# Altium PCB do_an.PcbDoc
Units mil, origin at the board's own origin, x right, y up, seen from the top; angles counter-clockwise.
Board outline 3530 x 2715 mil, 2 copper layers (Top Layer, Bottom Layer); 15 components, 19 nets, 67 pads, 0 vias.
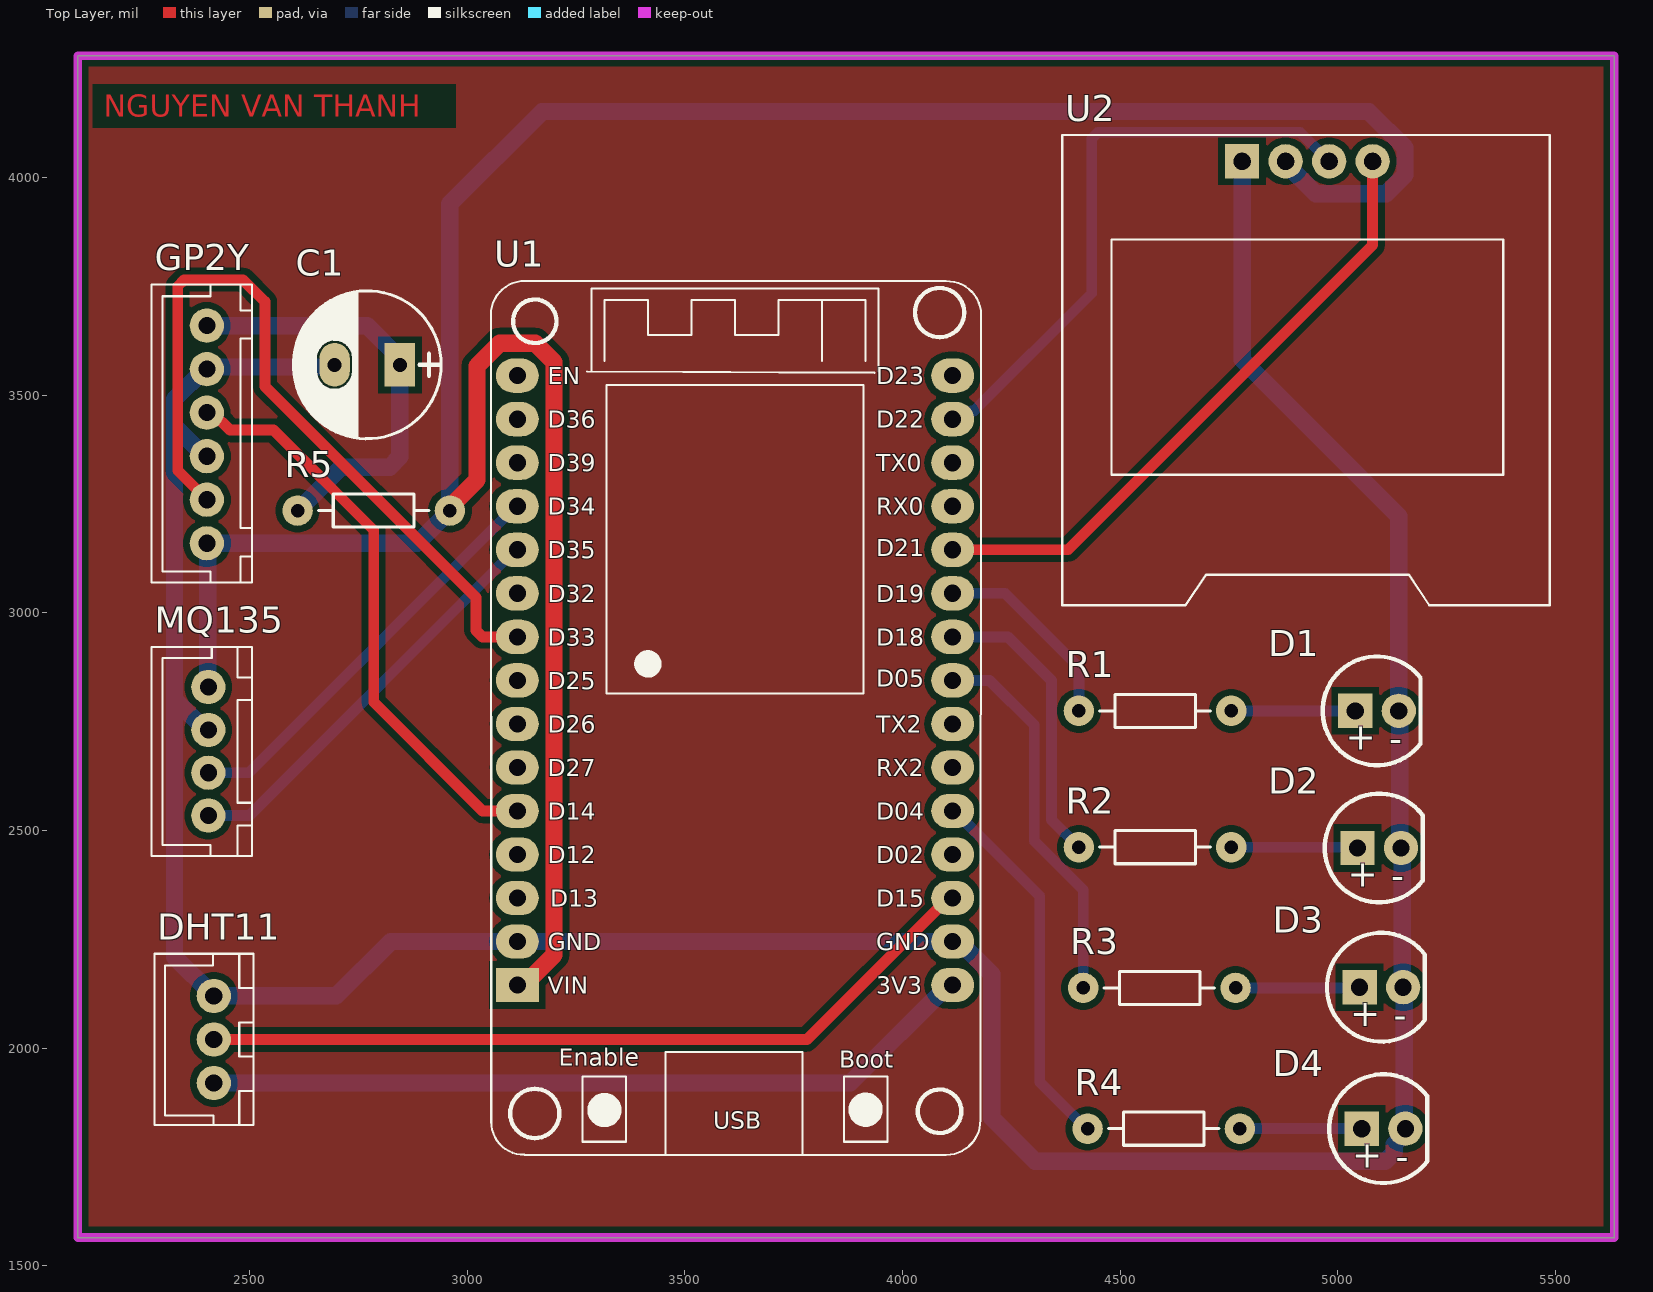
[diagram p0: Top Layer view]
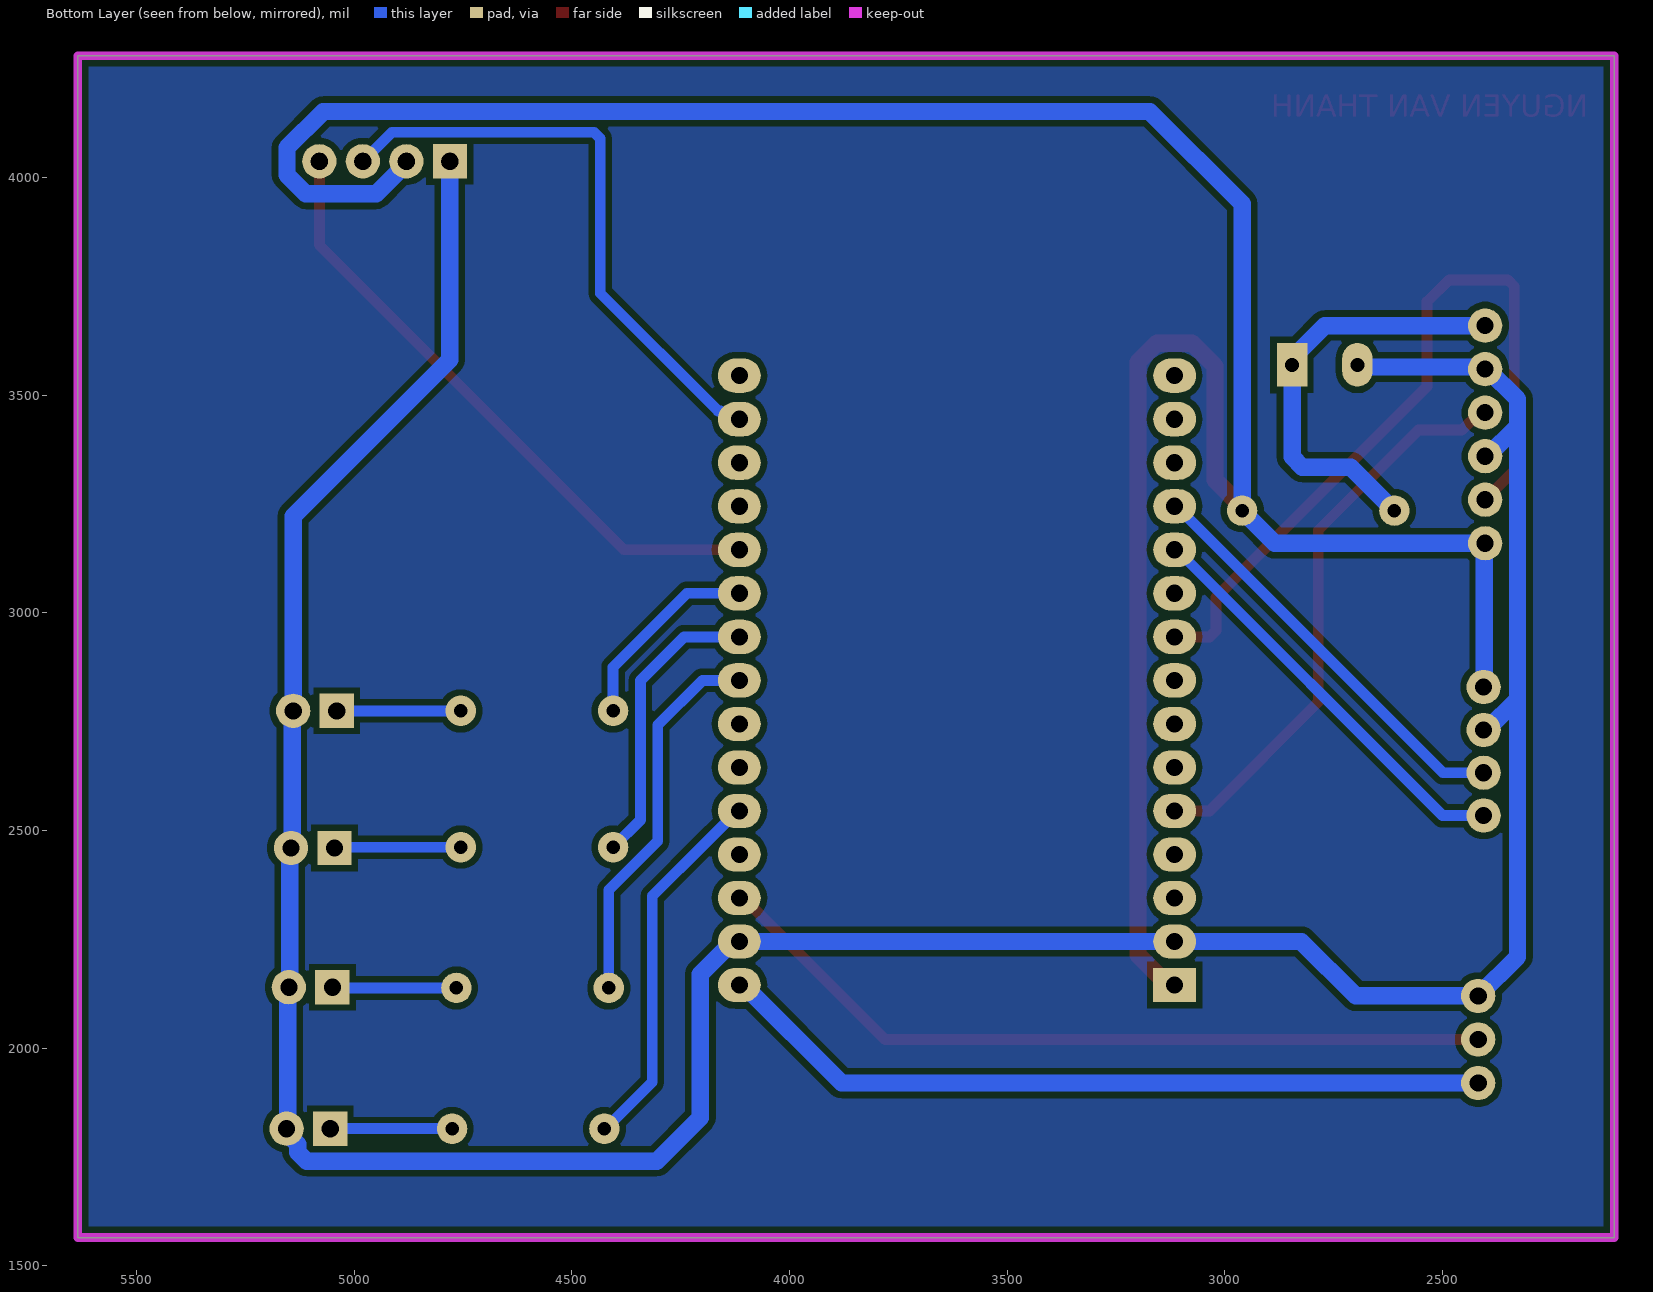
[diagram p1: Bottom Layer view, seen from below]
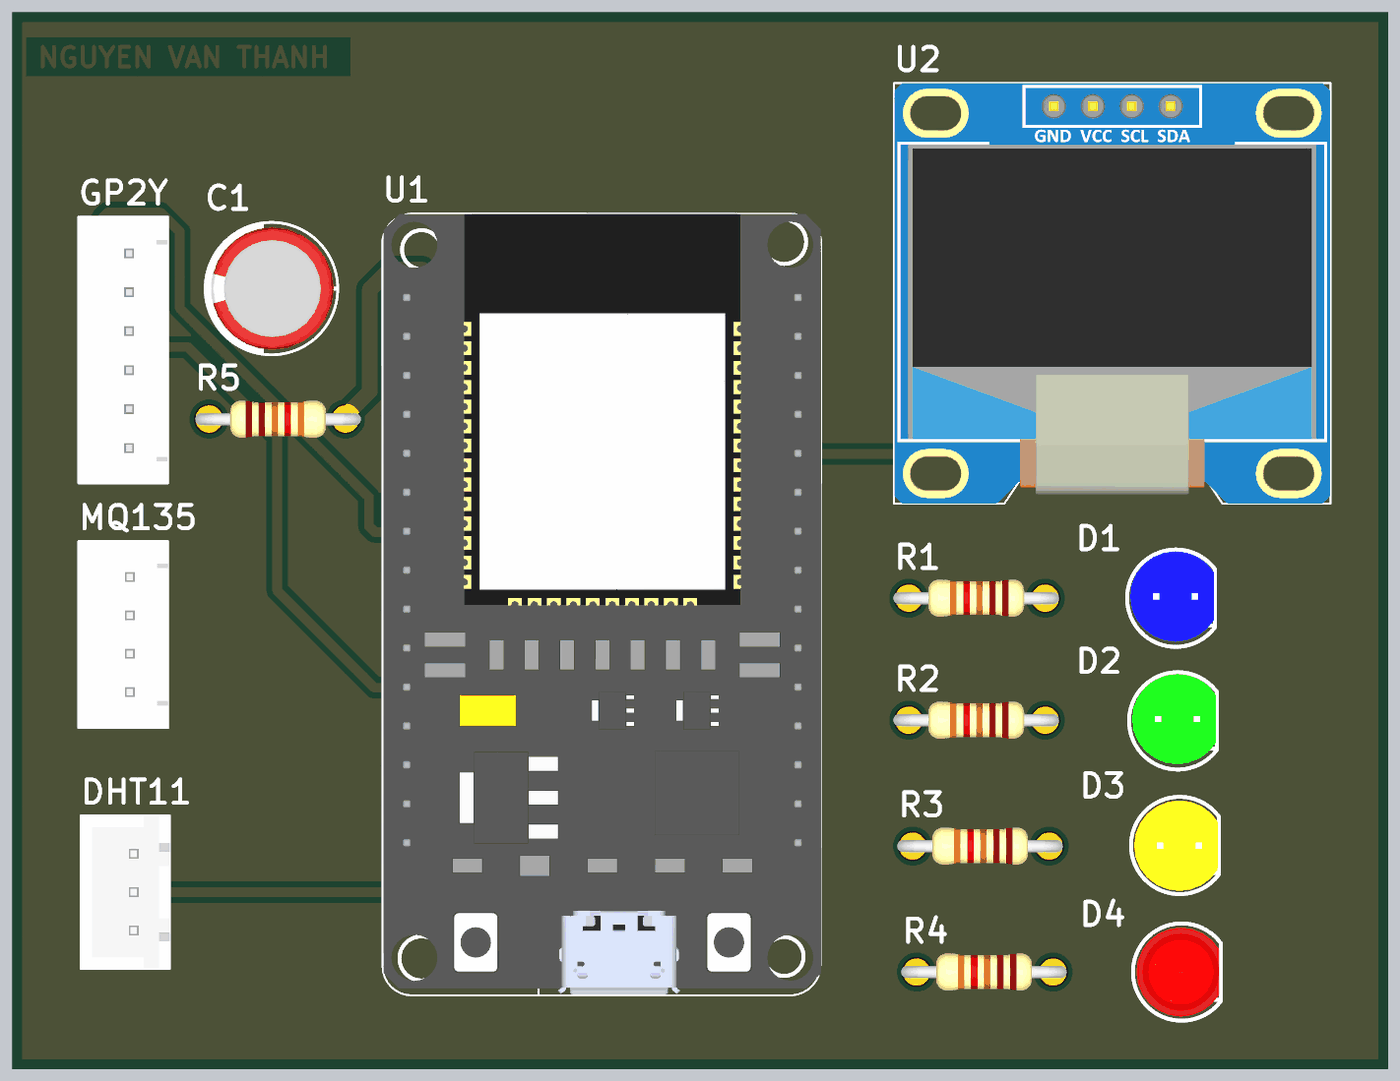
[diagram p2: 3D render of the assembled board from above, using the file's embedded part models]

## Layer stack, top to bottom
Top Solder: solder mask 0.4, Solder Resist, Dk 3.5
Top Layer: signal copper 1.4
Dielectric 1: dielectric 12.6, FR-4, Dk 4.8
Bottom Layer: signal copper 1.4
Bottom Solder: solder mask 0.4, Solder Resist, Dk 3.5

## Board outline
2105,1565 5635,1565 5635,4280 2105,4280

## Design rules (kind name [scope] priority, off if disabled: settings)
Clearance [All] p1: gap=15 ignorepadtopadclearanceinfootprint=FALSE
PolygonConnect [All] p1: connectstyle=Relief reliefconductorwidth=10 reliefentries=4 polygonreliefangle="90 Angle" airgapwidth=10
RoutingVias [All] p1: holewidth=28 width=50 viastyle="Through Hole" minholewidth=28 minwidth=50 maxholewidth=28 maxwidth=50
SolderMaskExpansion [All] p1: expansion=4 istentingtop=FALSE
Width [All] p1: maxlimit=50 minlimit=15 preferedwidth=25
30 further rules are at their usual default settings.

## Components (designator, comment, footprint, x,y, rotation, side; value= is the part's Value field where it differs from the comment)
C1 "220uF" CP1.5/3.4 2845,3570 r180 top value=1000uF/16V
D1 "LED_BLUE" LED_5mm_BLUE 5090,2775 r0 top
D2 "LED_GREEN" LED_5mm_GREEN 5095,2460 r0 top
D3 "LED_YELLOW" LED_5mm_YELLOW 5100,2140 r0 top
D4 "LED_RED" LED_5mm_RED 5105,1815 r0 top
DHT11 "DHT11" JST-2.54-3P 2395,2020 r0 top
GP2Y "GP2Y1010AU0F" JST-2.54-6P 2389.84,3412.24 r0 top
MQ135 "MQ135" JST-2.54-4P 2389.84,2681.57 r0 top
R1 "150" R1/4W 4405,2775 r0 top value="R1/4W - 1K"
R2 "150" R1/4W 4405,2461.67 r0 top value="R1/4W - 1K"
R3 "150" R1/4W 4415,2138.33 r0 top value="R1/4W - 1K"
R4 "150" R1/4W 4425,1815 r0 top value="R1/4W - 1K"
R5 "150" R1/4W 2960,3235 r180 top value="R1/4W - 1K"
U1 "ESP32_30 PIN" ESP32_30 3615,2845 r0 top
U2 "DISPLAY_OLED" DISPLAY_OLED 4930,3560 r0 top

## Footprints (in the part's own frame and the unit in brackets; to place one, negate y for a bottom-side part, rotate by r counter-clockwise, add the part's x,y. Pads: shape width x height; smd on the part's side, far side on the other; paste and mask are expansions set on the pad)
CP1.5/3.4 [mil] "Tu hoa 220->470uF,16V, 470uF/16V,25V"
  rect 70x100 hole 32: 1(0,0)
  oval 70x100 hole 32: 2(150,0)
  silkscreen extent -95,-170 245,170, body extent -85,-157 230,157, height 446
DISPLAY_OLED [mm]
  rect 2x2 hole 1: 1(-3.81,12.128)
  round 2 hole 1: 2(-1.27,12.128) 3(1.27,12.128) 4(3.81,12.128)
  silkscreen extent -14.3,-13.78 14.15,13.66, body extent -14.28,-13.76 14.12,13.64, height 5.7
ESP32_30 [mm] "Microcontoller Board 30 Pins Wifi 2.4GHz BLE 4.2 ESP32-WROOM-32D"
  oval 2.5x2 hole 1: 1(-12.7,17.78) 2(-12.7,15.24) 3(-12.7,12.7) 4(-12.7,10.16) 5(-12.7,7.62) 6(-12.7,5.08) 7(-12.7,2.54) 8(-12.7,0) 9(-12.7,-2.54) 10(-12.7,-5.08) 11(-12.7,-7.62) 12(-12.7,-10.16) 13(-12.7,-12.7) 14(-12.7,-15.24) 16(12.7,17.78) 17(12.7,15.24) 18(12.7,12.7) 19(12.7,10.16) 20(12.7,7.62) 21(12.7,5.08) 22(12.7,2.54) 23(12.7,0) 24(12.7,-2.54) 25(12.7,-5.08) 26(12.7,-7.62) 27(12.7,-10.16) 28(12.7,-12.7) 29(12.7,-15.24) 30(12.7,-17.78)
  rect 2.5x2 hole 1: 15(-12.7,-17.78)
  silkscreen extent -14.23,-27.69 14.35,23.31, body extent -14.15,-27.61 14.35,23.29, height 7
JST-2.54-3P [mm]
  round 2 hole 1: 1(0.573,2.54) 2(0.573,0) 3(0.573,-2.54)
  silkscreen extent -2.9,-5 2.9,5, body extent -2.85,-4.95 2.9,4.95, height 7.02
JST-2.54-4P [mm]
  round 2 hole 1: 1(0.385,3.76) 2(0.385,1.26) 3(0.385,-1.24) 4(0.385,-3.74)
  silkscreen extent -2.92,-6.1 2.92,6.1, body extent -2.92,-6.09 2.92,6.09, height 7.21
JST-2.54-6P [mm]
  round 2 hole 1: 1(0.298,6.293) 2(0.298,3.753) 3(0.298,1.213) 4(0.298,-1.327) 5(0.298,-3.867) 6(0.298,-6.407)
  silkscreen extent -2.92,-8.69 2.92,8.69, body extent -2.97,-8.73 2.87,8.64, height 7.23
LED_5mm_BLUE [mm]
  rect 2x2 hole 1: 1(-1.27,0)
  round 2 hole 1: 2(1.27,0)
  silkscreen extent -3.17,-3.17 2.54,3.17, body extent -2.97,-2.83 2.48,3.07, height 8.65
LED_5mm_GREEN [mm]
  rect 2x2 hole 1: 1(-1.27,0)
  round 2 hole 1: 2(1.27,0)
  silkscreen extent -3.17,-3.17 2.54,3.17, body extent -2.97,-2.83 2.48,3.07, height 8.65
LED_5mm_RED [mm]
  rect 2x2 hole 1: 1(-1.27,0)
  round 2 hole 1: 2(1.27,0)
  silkscreen extent -3.17,-3.17 2.54,3.17, body extent -2.94,-2.9 2.45,2.9, height 8.72
LED_5mm_YELLOW [mm]
  rect 2x2 hole 1: 1(-1.27,0)
  round 2 hole 1: 2(1.27,0)
  silkscreen extent -3.17,-3.17 2.54,3.17, body extent -2.97,-2.96 2.48,2.94, height 8.65
R1/4W [mil] "R 1/4W, 2 Pin, 350mil"
  round 70 hole 31: 1(0,0) 2(350,0)
  silkscreen extent 48,-38 302,38, body extent -40,-47 386,47, height 111

## Part data
C1: library part CP4, "Cap 1000uF/16V - 220uF/50V", Description 1="2200uF-3300uF/6,3V - 1000uF-2200uF/10V", Description 2="1000uF/16V - 470uF => 1000uF/25V - 100uF/100V", Description 3=330uF>470uF/35V_220uF>470uF/50V_10uF>22uF/250V, Description 4="220uF => 330uF/63V - 10uF =>33uF/160 - 200V", Description 5="4,7uF>10uF/250V_3,3uF>10uF/400V - 2,2uF>4,7uF/450V"
D1: library part LED_5mm_BLUE, "LED PTH 5mm Blue."
D2: library part LED_5mm_GREEN, "LED PTH 5mm Green."
D3: library part LED_5mm_YELLOW, "LED PTH 5mm Yellow."
D4: library part LED_5mm_RED, "LED PTH 5mm Red."
DHT11: library part JST-2.54-3P, "Female Connector JST 3 Vias, 2.54mm."
GP2Y: library part JST-2.54-6P, "Female Connector JST 6 Vias, 2.54mm."
MQ135: library part JST-2.54-4P, "Female Connector JST 4 Vias, 2.54mm."
R1 R2 R3 R4 R5: library part R1/4W, "Resistor 1/4W"
U1: library part ESP32_30, "Microcontoller Board 30 Pins Wifi 2.4GHz BLE 4.2 ESP32-WROOM-32D", ComponentLink1Description=Datasheet, ComponentLink1URL=https://www.mouser.com/datasheet/2/891/esp32_wroom_32d_esp32_wroom_32u_datasheet_en-1365844.pdf
U2: "Display Oled 128x64 0.96\" I2C."

## Nets (pads, with @x,y where several pads share a name; then routed paths per layer and width w, separated by ;. In a path a pad name is that pad's centre, name@x,y a point inside that pad or via, vN(x,y) a via of type N, cw(c..) or ccw(c..) an arc to the next point about the centre after c; other vN are vias at no path point)
3V3: DHT11.3 U1.30 | length 1790.6
  Bottom Layer w40: DHT11.3 3880.16,1920 4105.16,2145 U1.30
AO: MQ135.4 U1.5 | length 962.9
  Bottom Layer w25: MQ135.4 2499.33,2534.33 3110,3145 U1.5
D4: R4.1 U1.26 | length 862.6
  Bottom Layer w25: U1.26 4119.41,2545 4191.71,2472.7 4315,2349.41 4315,1922.18 4422.18,1815 R4.1
D5: R3.1 U1.23 | length 880.7
  Bottom Layer w25: U1.23 4200,2845 4302.5,2742.5 4302.5,2475.78 4415,2363.28 R3.1
D18: R2.1 U1.22 | length 677.8
  Bottom Layer w25: U1.22 4241.92,2945 4342.5,2844.42 4342.5,2524.17 R2.1
D19: R1.1 U1.21 | length 460.4
  Bottom Layer w25: U1.21 4235,3045 4405,2875 R1.1
DATA: DHT11.2 U1.28 | length 1832.1
  Top Layer w25: DHT11.2 3780.16,2020 4105.16,2345 U1.28
DO: MQ135.3 U1.4 | length 963.6
  Bottom Layer w25: MQ135.3 2498.34,2632.76 3110.59,3245 U1.4
GND: C1.2 D1.2 D2.2 D3.2 D4.2 DHT11.1 GP2Y.2 GP2Y.4 MQ135.2 U1.14 U1.29 U2.1 | length 7635.7
  Bottom Layer w40: GP2Y.4 2396.4,3360 2327.2,3429.19 ; MQ135.2 2398.25,2731.18 2327.2,2802.23 ; C1.2 2690,3565 2406.57,3565 GP2Y.2 2396.4,3560 2327.2,3490.81 2327.2,3429.19 ; U2.1 4780,3581.81 5140,3221.81 D1.2 5142.5,2772.5 5142.5,2462.5 D2.2 5147.5,2457.5 5147.5,2142.5 D3.2 5152.5,2137.5 5152.5,1817.5 D4.2 5155,1804.52 5129.37,1778.89 5129.37,1761.13 5108.87,1740.63 4304.37,1740.63 4205,1840 4205,2170.02 4130.02,2245 U1.29 U1.14 2823.86,2245 2698.86,2120 DHT11.1 2327.2,2210.35 2327.2,2802.23 ; 2327.2,2802.23 2327.2,3429.19
LED: GP2Y.3 U1.11 | length 1323.8
  Top Layer w25: GP2Y.3 2415,3460 2455,3420 2555,3420 2785,3190 2785,2795 3035,2545 U1.11
NetD1_1: D1.1 R1.2 | length 292.1
  Top Layer w10: D1.1 D1.1@5045,2780
  Bottom Layer w25: R1.2 D1.1
NetD2_1: D2.1 R2.2 | length 290.7
  Bottom Layer w25: R2.2 5043.33,2461.67 D2.1
NetD3_1: D3.1 R3.2 | length 285.7
  Bottom Layer w25: R3.2 5048.33,2138.33 D3.1
NetD4_1: D4.1 R4.2 | length 280
  Bottom Layer w25: R4.2 D4.1
SCL: U1.17 U2.3 | length 1373.9
  Bottom Layer w25: U1.17 4139.38,3445 4158.66,3464.28 4164.28,3464.28 4434.46,3734.46 4434.46,4089.73 4449.1,4104.37 4913.13,4104.37 U2.3
SDA: U1.20 U2.4 | length 1447.4
  Top Layer w25: U1.20 4380,3145 5080,3845 U2.4
V-LED: C1.1 GP2Y.1 R5.2 | length 987.2
  Bottom Layer w40: GP2Y.1 2770,3660 2845,3585 C1.1 2845,3358.43 2821.57,3335 2710,3335 R5.2
VIN: GP2Y.6 MQ135.1 R5.1 U1.15 U2.2 | length 6380
  Top Layer w40: R5.1 2960,3243.12 3022.31,3305.43 3022.31,3567.33 3074.35,3619.37 3155.65,3619.37 3199.21,3575.81 3199.21,2214.19 3149.39,2164.37 3134.37,2164.37 U1.15
  Bottom Layer w40: MQ135.1 2403.29,2831.32 2403.29,3158.29 GP2Y.6 2885,3160 R5.1 2960,3940 3171.87,4151.87 5070.81,4151.87 5154.37,4068.31 5154.37,4006.69 5110.81,3963.13 4949.19,3963.13 4887.1,4025.23 4880,4032.32 U2.2
VOUT: GP2Y.5 U1.7 | length 1802.4
  Top Layer w25: GP2Y.5 2334.7,3326.87 2334.7,3750.36 2349.35,3765 2485,3765 2535,3715 2535,3520 3020,3035 3020,2959.64 3034.64,2945 U1.7
pads on no net: U1.1 U1.2 U1.3 U1.6 U1.8 U1.9 U1.10 U1.12 U1.13 U1.16 U1.18 U1.19 U1.24 U1.25 U1.27

## Polygon pours and split planes (outlines as drawn)
no net on Bottom Layer "NONET_L02_P000" (solid, pour order 0): 2105,4280 5635,4280 5635,1565 2105,1565
no net on Top Layer "NONET_L01_P001" (solid, pour order 1): 2105,4280 5635,4280 5635,1565 2105,1565

## Keep-outs
Keep-Out Layer:
  lines w20: 2105,1565 2140,1565 5575,1565 5635,1565 5635,4280 2105,4280 2105,1565

## Other copper
Top Layer:
  text "NGUYEN VAN THANH" at 2165,4140 h50

## Text inside footprints (layer, text, board x,y; h text height)
D1: Top Overlay "+" at 5018.08,2685.79 h60; Top Overlay "-" at 5118.08,2680.79 h60
D2: Top Overlay "+" at 5023.08,2370.79 h60; Top Overlay "-" at 5123.08,2365.79 h60
D3: Top Overlay "-" at 5128.08,2045.79 h60; Top Overlay "+" at 5028.08,2050.79 h60
D4: Top Overlay "+" at 5033.08,1725.79 h60; Top Overlay "-" at 5133.08,1720.79 h60
U1: Top Overlay "Enable" at 3210,1960 h39.37; Top Overlay "Boot" at 3855,1955 h39.37; Top Overlay "USB" at 3565,1815 h39.37; Top Overlay "EN" at 3185,3525 h39.37; Top Overlay "D23" at 3940,3525 h39.37; Top Overlay "D36" at 3185,3425 h39.37; Top Overlay "TX2" at 3940,2725 h39.37; Top Overlay "RX2" at 3940,2625 h39.37; Top Overlay "D15" at 3940,2325 h39.37; Top Overlay "D02" at 3940,2425 h39.37; Top Overlay "GND" at 3940,2225 h39.37; Top Overlay "D04" at 3940,2525 h39.37; Top Overlay "3V3" at 3940,2125 h39.37; Top Overlay "D39" at 3185,3325 h39.37; Top Overlay "D12" at 3185,2425 h39.37; Top Overlay "VIN" at 3185,2125 h39.37; Top Overlay "GND" at 3185,2225 h39.37; Top Overlay "D14" at 3185,2525 h39.37; Top Overlay "D27" at 3185,2625 h39.37; Top Overlay "D13" at 3190,2325 h39.37; Top Overlay "D26" at 3185,2725 h39.37; Top Overlay "D32" at 3185,3025 h39.37; Top Overlay "D34" at 3185,3225 h39.37; Top Overlay "D35" at 3185,3125 h39.37; Top Overlay "D33" at 3185,2925 h39.37; Top Overlay "D25" at 3185,2825 h39.37; Top Overlay "D19" at 3940,3025 h39.37; Top Overlay "D05" at 3940,2830 h39.37; Top Overlay "D18" at 3940,2925 h39.37; Top Overlay "D21" at 3940,3130 h39.37; Top Overlay "D22" at 3940,3425 h39.37; Top Overlay "TX0" at 3940,3325 h39.37; Top Overlay "RX0" at 3940,3225 h39.37